# Allegro board W3IOA board.brd
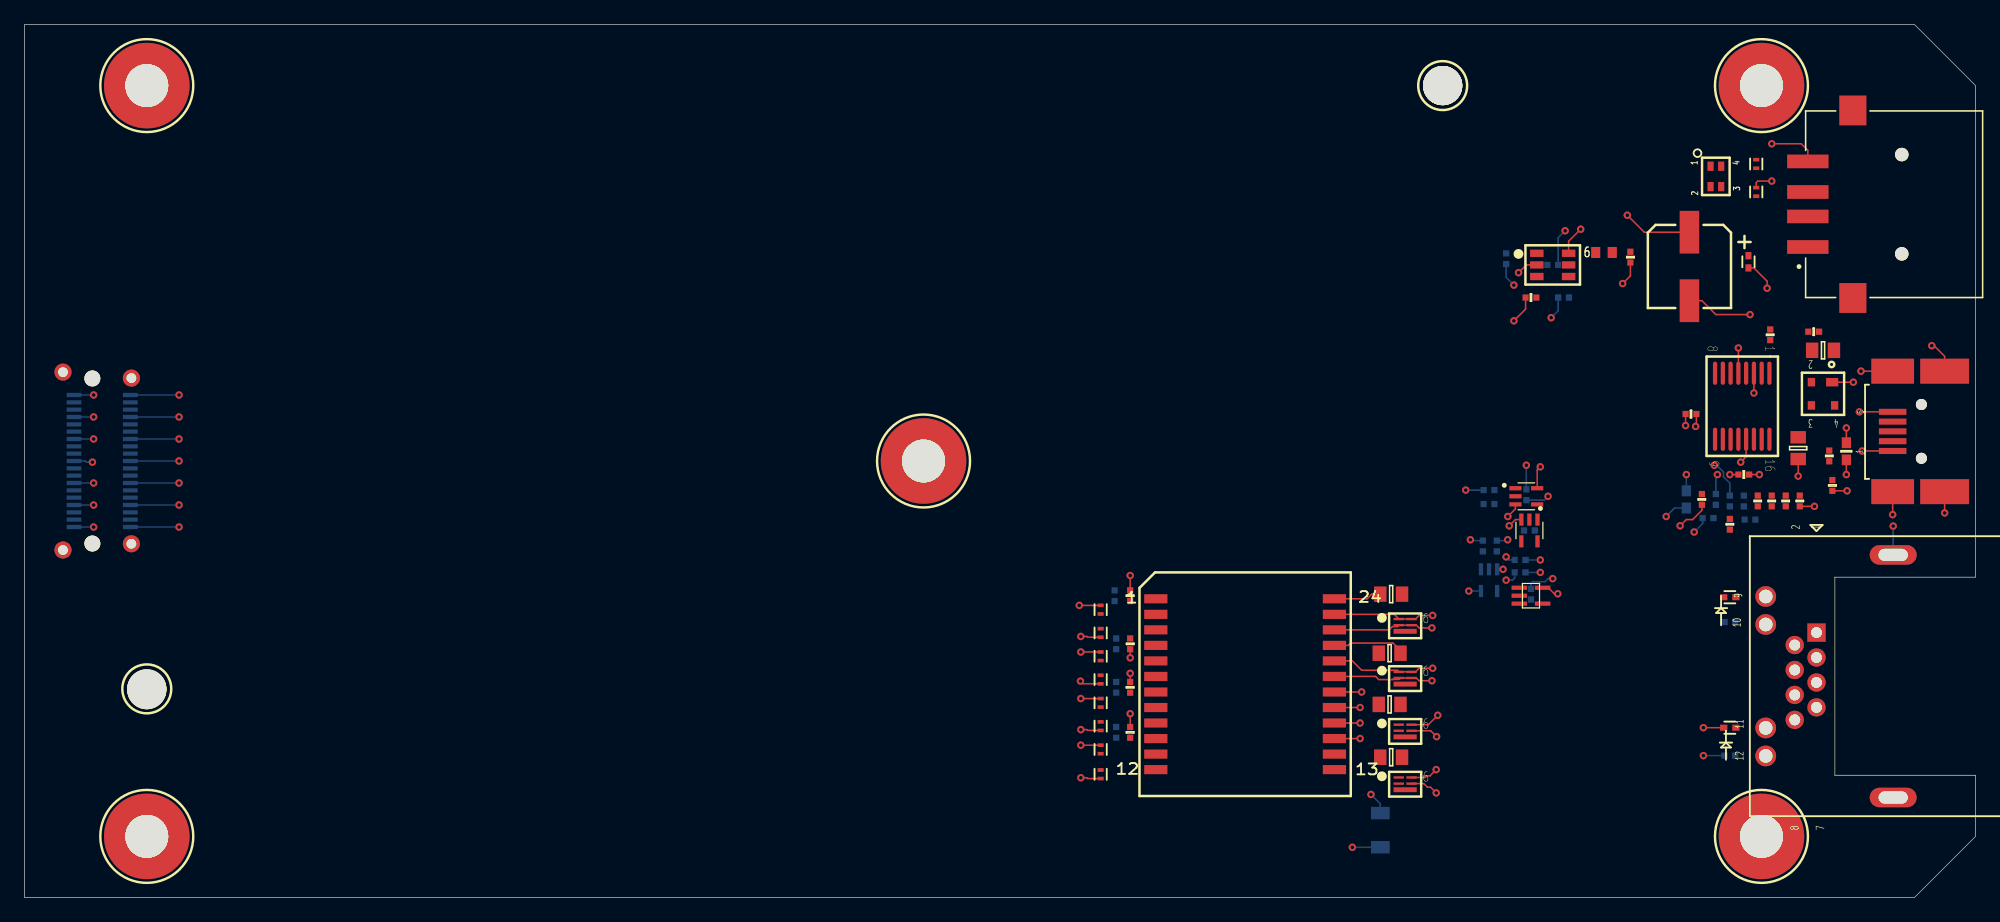
[diagram p0: board, top side]
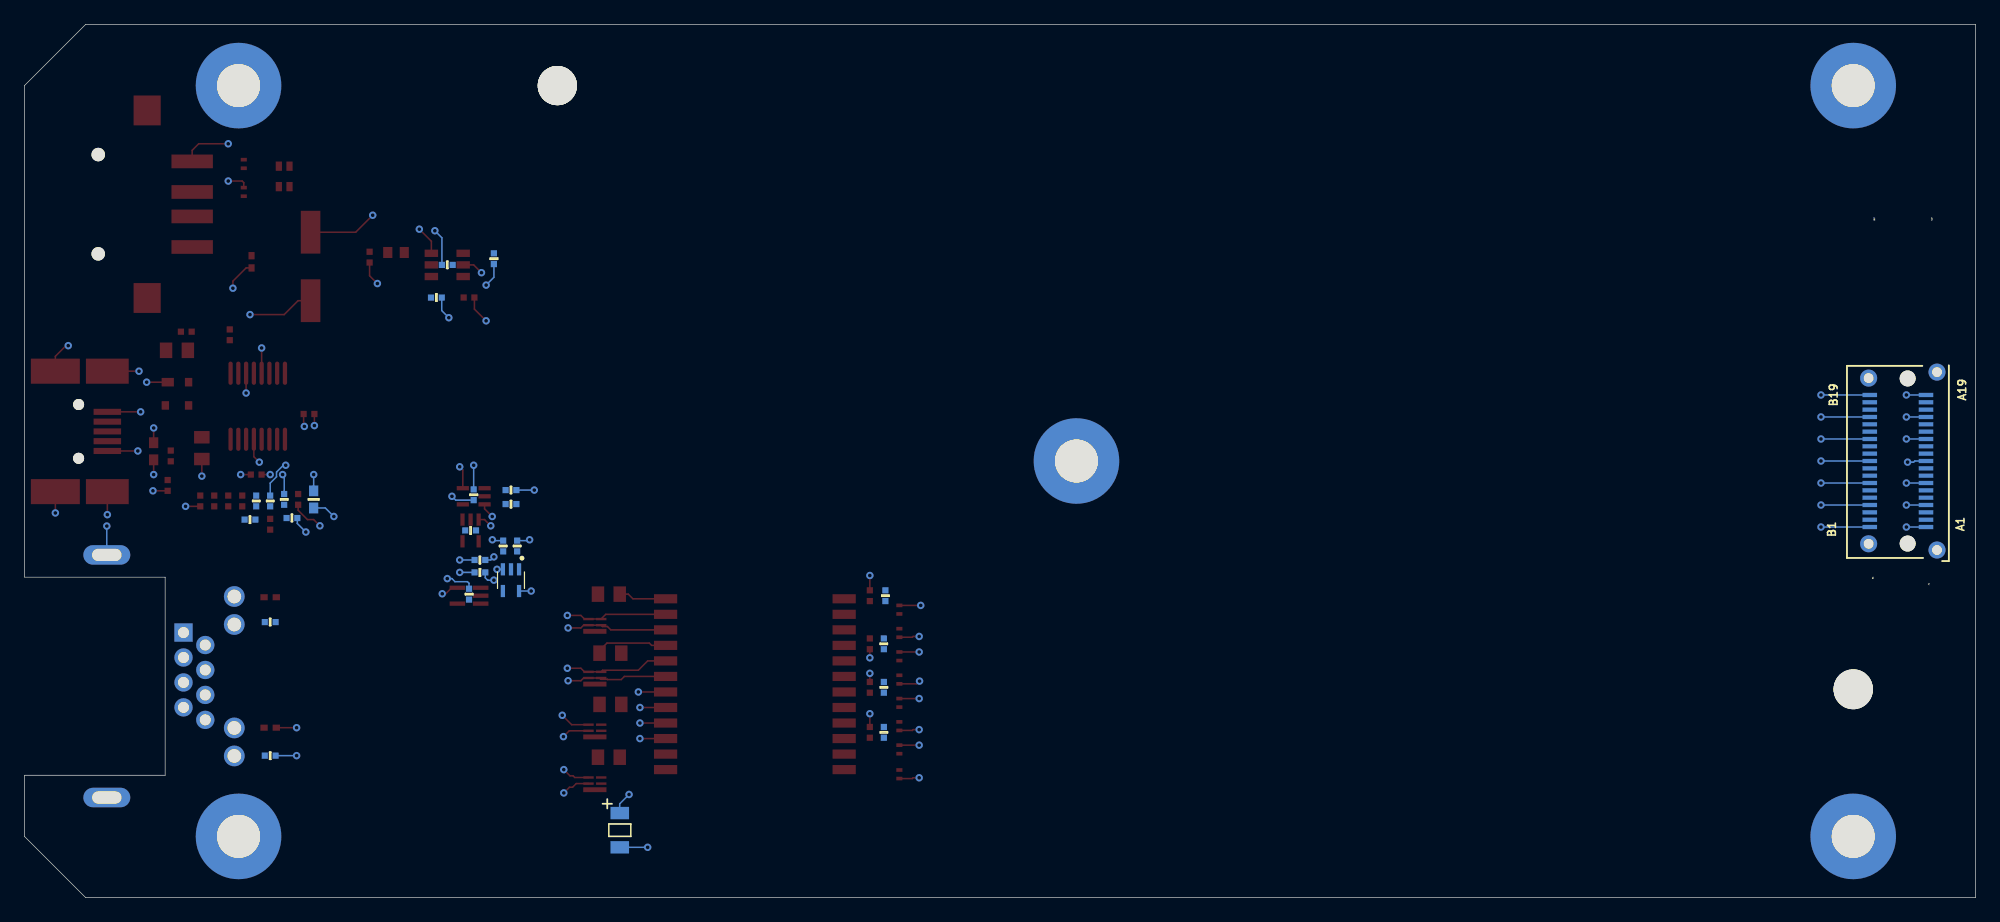
[diagram p1: board, bottom side, seen from below]

Outline 159.5 x 71.4 mm; copper layers: TOP, L2_GND1, L3_SIG1, L4_PWR1, L5_GND2, L6_SIG2, L7_PWR/GND, BOTTOM. Coordinates in mm from the lower left corner of the outline.
Outline path: 0,71.4 0,0 154.5,0 159.5,5 159.5,10 148,10 148,26.2 159.5,26.2 159.5,66.4 154.5,71.4 0,71.4

## Design rules (mm)
constraint set DEFAULT: min track width 0.127
net group AC_GBE0_MDIO0: nets AC_GBE0_MDIO0_N AC_GBE0_MDIO0_P
net group AC_GBE0_MDIO1: nets AC_GBE0_MDIO1_N AC_GBE0_MDIO1_P
net group AC_GBE0_MDIO2: nets AC_GBE0_MDIO2_N AC_GBE0_MDIO2_P
net group AC_GBE0_MDIO3: nets AC_GBE0_MDIO3_N AC_GBE0_MDIO3_P
net group DP1: nets USB_UART_RX_R USB_UART_TX_R
net group DP2: nets AC_USB_UART_RX AC_USB_UART_TX
net group DP3: nets PHY_TXRXN_A PHY_TXRXP_A
net group DP4: nets PHY_TXRXN_B PHY_TXRXP_B
net group DP5: nets PHY_TXRXN_C PHY_TXRXP_C
net group DP6: nets PHY_TXRXN_D PHY_TXRXP_D
net group SW_USB1_CONN_D: nets SW_USB1_CONN_DN SW_USB1_CONN_DP

## Placement (name value [footprint] x y rotation side)
C1  0.1uF  [SMC0402A]  122.27 26.59 0 bottom
C2  0.1uF  [SMC0402A]  123.16 24.81 270 bottom
C3  NA  [SMC0402A]  147.79 33.7 270 top
C4  2.2uF  [SMC0603A]  148.94 36.5 270 top
C5  47pF  [SMC0805A]  147.03 44.75 0 top
C6  47pF  [SMC0805A]  145 36.75 270 top
C7  0.1uF  [SMC0402A]  137.63 31.04 180 bottom
C8  0.1uF  [SMC0402A]  136.24 39.54 180 top
C9  2.2uF  [SMC0603A]  135.86 32.56 90 bottom
C10  0.1uF  [SMC0402A]  140.56 34.59 0 top
C11  0.1uF  [SMC0402A]  121.12 52.24 270 bottom
C12  150uF  [SMC2626_ALEL_C]  136.11 51.61 0 top
C13  0.1uF  [SMC0402A]  131.28 52.37 270 top
C14  0.1uF  [SMC0402A]  122.27 27.61 0 bottom
C15  1000pF  [SMC1206A]  110.84 5.51 270 bottom
C16  0.1uF  [SMC0402A]  90.39 20.75 270 top
C18  0.1uF  [SMC0402A]  90.39 17.19 90 top
C19  0.1uF  [SMC0402A]  90.39 13.51 90 top
C218  0.1uF  [SMC0402A]  90.39 24.68 90 top
C5904  0.1uF  [SMC0402A]  122.78 32.94 270 bottom
D1  COMP_VALUE  [X1SON_0110X0070_070]  141.57 59.99 90 top
D2  COMP_VALUE  [X1SON_0110X0070_070]  141.57 57.7 270 top
D3  COMP_VALUE  [X1SON_0101X0070_0100]  140.94 51.99 270 top
D4  COMP_VALUE  [X1SON_0101X0070_0100]  139.41 24.56 180 top
D5  COMP_VALUE  [X1SON_0101X0070_0100]  139.41 13.89 180 top
D6  COMP_VALUE  [X1SON_0110X0070_070]  87.98 21.64 90 top
D7  COMP_VALUE  [X1SON_0110X0070_070]  87.98 23.54 270 top
D8  COMP_VALUE  [X1SON_0110X0070_070]  87.98 17.83 90 top
D9  COMP_VALUE  [X1SON_0110X0070_070]  87.98 19.73 270 top
D10  COMP_VALUE  [X1SON_0110X0070_070]  87.98 14.02 90 top
D11  COMP_VALUE  [X1SON_0110X0070_070]  87.98 15.92 270 top
D12  COMP_VALUE  [X1SON_0110X0070_070]  87.98 10.08 90 top
D13  COMP_VALUE  [X1SON_0110X0070_070]  87.98 12.11 270 top
FB1  60  [INDC1608_IS0603Q]  129.13 52.75 0 top
J1  COMP_VALUE  [CONN4_USB_1-292303-6]  153.47 52.64 90 top
J4  COMP_VALUE  [CONN_RJE721881411]  146.5 21.67 90 top
J75  COMP_VALUE  [CNT5F_SMT_USB_V3]  152.72 36.52 90 top
J78  COMP_VALUE  [SCONN38_G42V11342HR]  5.55 28.95 90 bottom
L1  820OHM  [CHOKE_0805USB]  138.27 58.98 90 top
M1  COMP_VALUE  [MH_0000X0000_320NPT]  10 17.06 0 top
M2  COMP_VALUE  [MH_0000X0000_320NPT]  115.94 66.4 0 top
MH1  COMP_VALUE  [MH_0700X0700_350PT]  10 66.4 0 top
MH2  COMP_VALUE  [MH_0700X0700_350PT]  10 5 0 top
MH3  COMP_VALUE  [MH_0700X0700_350PT]  73.5 35.7 0 top
MH4  COMP_VALUE  [MH_0700X0700_350PT]  142 66.4 0 top
MH5  COMP_VALUE  [MH_0700X0700_350PT]  142 5 0 top
NOREF  -  []  2.46 40.84 90 top
NOREF#2  -  []  8.65 30.3 90 top
NOREF#3  -  [unnamed#2]  115.94 66.4 0 top
NOREF#4  -  []  8.74 28.93 90 top
NOREF#5  -  []  7.23 28.2 0 top
NOREF#6  -  []  4.05 30.3 90 top
NOREF#7  -  [unnamed#3]  10 66.4 0 top
NOREF#8  -  [unnamed#3]  73.5 35.7 0 top
NOREF#9  -  [unnamed#3]  142 5 0 top
NOREF#10  -  []  149.47 49.03 90 top
NOREF#11  -  [unnamed#3]  10 5 0 top
NOREF#12  -  [unnamed#2]  10 17 0 top
NOREF#13  -  [unnamed#3]  142 66.4 0 top
NOREF#14  -  []  3.15 28.42 90 top
NOREF#15  -  []  145.79 53.2 90 top
R1  0  [SMR0402A]  89.25 20.75 90 bottom
R2  0  [SMR0402A]  89.25 17.19 270 bottom
R3  0  [SMR0402A]  89.25 13.51 270 bottom
R136  0  [SMR0402A]  139.41 32.43 270 bottom
R137  0  [SMR0402A]  138.27 32.56 270 bottom
R138  0  [SMR0402A]  137.13 32.56 90 top
R139  0  [SMR0402A]  142.72 46.02 90 top
R140  0  [SMR0402A]  141.7 32.43 90 top
R141  10K  [SMR0402A]  119.73 33.32 180 bottom
R142  10K  [SMR0402A]  120.36 28.75 90 bottom
R143  10K  [SMR0402A]  123.03 30.02 0 bottom
R144  10K  [SMR0402A]  119.73 32.18 0 bottom
R145  10K  [SMR0402A]  139.41 30.53 270 top
R146  27  [SMR0402A]  142.84 32.43 90 top
R147  27  [SMR0402A]  146.27 46.27 180 top
R148  4.7K  [SMR0402A]  141.06 30.91 0 bottom
R149  4.7K  [SMR0402A]  143.99 32.43 90 top
R150  10K  [SMR0402A]  145.13 32.43 270 top
R151  10K  [SMR0402A]  123.16 49.07 180 top
R152  10K  [SMR0402A]  125.82 49.07 180 bottom
R153  90.9K  [SMR0402A]  124.94 51.74 180 bottom
R154  0  [SMR0402A]  89.12 24.68 270 bottom
R158  240  [SMR0402A]  139.41 11.6 0 bottom
R159  240  [SMR0402A]  139.41 22.53 180 bottom
R462  75  [SMR0805A]  111.73 11.48 0 top
R463  75  [SMR0805A]  111.6 15.79 0 top
R464  75  [SMR0805A]  111.6 19.99 0 top
R465  75  [SMR0805A]  111.73 24.81 180 top
R621  0  [SMR0402A]  147.54 36.11 270 top
R710  0  [SMR0402A]  140.56 32.43 270 bottom
R5906  10K  [SMR0402A]  119.22 28.75 90 bottom
T1  COMP_VALUE  [TRANSFORM_0024_1753X1220_127]  99.79 17.45 0 top
U1  -  [SC70-5_SC88-5_1_2_3_4_5]  123.03 30.02 270 top
U2  -  [SOT23_5_P0_65]  123.16 24.68 180 top
U3  COMP_VALUE  [SOT143B]  147.03 41.2 180 top
U4  COMP_VALUE  [SSOP_0016_0500X0400_063]  140.43 40.18 270 top
U5  COMP_VALUE  [SOT23_0006_0300X0175_095]  124.94 51.74 0 top
U6  -  [SC70-5_SC88-5_1_2_3_4_5]  119.73 25.95 270 bottom
U110  COMP_VALUE  [ESD_SLP1610P4T]  112.87 9.32 0 top
U111  COMP_VALUE  [ESD_SLP1610P4T]  112.87 13.64 0 top
U112  COMP_VALUE  [ESD_SLP1610P4T]  112.87 17.95 0 top
U113  COMP_VALUE  [ESD_SLP1610P4T]  112.87 22.27 0 top
U5903  -  [SC70-5_SC88-5_1_2_3_4_5]  122.78 32.81 0 top

## Library data of the parts
C1 C2 C7 C8 C11 C13 C14 C5904 = CAP: alternate symbols: (0402,0402_ALT,SMX0402B); part number: CAP_0402LF-0.1UF,25V,10%,X7R,; tolerance: 10%
C3 = CAP: alternate symbols: (0402,0402_ALT,SMX0402B); part number: CAP_0402LF-0.01UF,16V,10%,X7R,C50295-001; tolerance: 10%
C4 C9 = CAP: alternate symbols: (); part number: CAP_0603-2.2UF,10V,10%,X7R,603269-068; tolerance: 10%
C5 C6 = CAP: alternate symbols: (SMC0805AW); part number: CAP_0805-47PF,50V,5%,COG,108425-009; tolerance: 5%
C10 C16 C18 C19 C218 = CAP: alternate symbols: (0402,0402_ALT,SMX0402B,SMC0402A_SPL); part number: CAP_0402LF-0.1UF,16V,10%,X7R,A36096-030; tolerance: 10%
C12 = CAPP: Tolerance: 20%; User Part Number: EEE-FP1A151AL; part number: CAPP_2626 -150UF,10V,20%,,EEE-FP1A151AL; tolerance: 20%
C15 = CAP: alternate symbols: (SMC1206AW); part number: CAP_1206LF-1000PF,2KV,20%,X7R,22006117; tolerance: 20%
D1 D2 D6-D13 = ESD321DPYR: User Part Number: PART_NO; Tolerance: TOLERANCE
D3-D5 = ESD_COMMON_ANODE: User Part Number: TPD1E10B06DPYR; Tolerance: TOLERANCE; part number: ESD_COMMON_ANODE_2-X1SON-TPD1E10B06DPYR,5.5 V
FB1 = FERRITE: User Part Number: MPZ1608S600ATAH0; part number: FERRITE_SM-60,FB,MPZ1608S600ATAH0
J1 = USB2: Tolerance: TOLERANCE; User Part Number: PART_NO
J4 = CONNRJ45_2LEDS: Tolerance: TOLERANCE; User Part Number: RJE72-188-1411; part number: CONNRJ45_2LEDS-RJE72-188-1411
J75 = CONN5_USB_4GND_V2: User Part Number: 22012093; Tolerance: TOLERANCE; part number: CONN5_USB_4GND_V2-22012093
J78 = G42V11342HR: User Part Number: PART_NO; Tolerance: TOLERANCE
L1 = CHOKE_4PIN: User Part Number: 0805USB-262MLC; Tolerance: TOLERANCE; part number: CHOKE_4PIN_0805-820OHM,FERRITE,0805USB-262MLC
M1 M2 = MH_0000X0000_320NPT: User Part Number: PART_NO; Tolerance: TOLERANCE
MH1-MH5 = MH_0700X0700_350PT: User Part Number: PART_NO; Tolerance: TOLERANCE
R1-R3 R154 = RES: alternate symbols: (0402,0402_ALT,SMX0402B); part number: RES_0402-0,5%,1/16W,CHIP,A36093-001; tolerance: 5%
R136-R138 = RES: alternate symbols: (0402,0402_ALT,SMX0402B); part number: RES_0402LF-0,5%,1/16W,CHIP,A93549-001; tolerance: 5%
R139 R140 R621 R710 = RES: alternate symbols: (0402,0402_ALT,SMX0402B); part number: RES_0402LF-0,5%,1/16W,CHIP,A93549-001; tolerance: 5%; room: P3V3_AUX_BMC_RGM_SWITCH
R141-R145 R150-R152 R5906 = RES: alternate symbols: (0402,0402_ALT,SMX0402B); part number: RES_0402-10K,1%,1/16W,CHIP,A36092-434; tolerance: 1%
R146 R147 = RES: alternate symbols: (0402,0402_ALT,SMX0402B); part number: RES_0402LF-27,5%,1/16W,CHIP,22013425; tolerance: 5%
R148 R149 = RES: alternate symbols: (0402,0402_ALT,SMX0402B); part number: RES_0402LF-4.7K,5%,1/16W,CHIP,A93549-020; tolerance: 5%
R153 = RES: alternate symbols: (0402,0402_ALT,SMX0402B); part number: RES_0402LF-90.9K,1%,1/16W,CHIP,A93548-381; tolerance: 1%
R158 R159 = RES: alternate symbols: (SMX0402,SMX0402A,SMX0402B,SMR0402A_SPL); part number: RES_0402-240,1.0%,1/16W,CHIP,G21796-294; tolerance: 1.0%
R462-R465 = RES: alternate symbols: (SMR0805AW); part number: RES_0805-75,5%,1/10W,CHIP,201645-022; tolerance: 5%
T1 = H5007: User Part Number: PART_NO; Tolerance: TOLERANCE
U1 U6 U5903 = 74AHC1G08GW: User Part Number: Part No
U2 = 1G125: part number: 1G125-91617021-001
U3 = PRTR5V0U: User Part Number: PRTR5V0U2X,215; Tolerance: TOLERANCE; part number: PRTR5V0U_SOT-143B-PRTR5V0U2X,215
U4 = FT230XS: Tolerance: TOLERANCE; User Part Number: FT230XS-R; part number: FT230XS_SSOP-IC,FT230XS-R
U5 = TPS25221DBVR: User Part Number: PART_NO; Tolerance: TOLERANCE
U110-U113 = RCLAMP0542T: Tolerance: TOLERANCE; User Part Number: PART_NO

## Footprints (pads in the part's own frame, mm; a bottom-side part is the same pattern mirrored in y, then rotated)
CHOKE_0805USB
  rect 0.76x0.51 smd: 1(0.835,0.435) 2(-0.835,0.435) 3(-0.835,-0.435) 4(0.835,-0.435)
CNT5F_SMT_USB_V3
  round 0.9 hole 0.9 unplated: (-0.6,-2.35) (3.8,-2.35)
  rect 0.5x2.25 smd: 1(0,0) 2(0.8,0) 3(1.6,0) 4(2.4,0) 5(3.2,0)
  rect 2.05x3.5 smd: 6(-3.325,0) 7(6.525,0)
  rect 2.05x4 smd: 8(-3.325,-4.25) 9(6.525,-4.25)
CONN4_USB_1-292303-6
  round 1.1 hole 1.1 unplated: (0,0) (8.12,0)
  rect 1.12x3.39 smd: 1(0.56,7.68) 2(3.06,7.68) 3(5.06,7.68) 4(7.56,7.68)
  rect 2.44x2.22 smd: SH1(-3.61,4) SH2(11.73,4)
CONN_RJE721881411
  rect 1.5x1.5 hole 0.9: 1(0,0)
  round 1.5 hole 0.9: 2(-1.02,1.78) 3(-2.04,0) 4(-3.06,1.78) 5(-4.08,0) 6(-5.1,1.78) 7(-6.12,0) 8(-7.14,1.78)
  round 1.7 hole 1.12: 9(2.95,4.15) 10(0.66,4.15) 11(-7.8,4.15) 12(-10.09,4.15)
  oval 1.6x3.84 hole 1x2.4: GND_SH1(-13.49,-6.27) GND_SH2(6.35,-6.27)
ESD_SLP1610P4T
  rect 0.85x0.2 smd: 1(-0.52,0.5) 2(-0.52,0) 5(0.52,0) 6(0.52,0.5)
  rect 1.9x0.4 smd: 3(0,-0.5)
INDC1608_IS0603Q
  rect 0.75x0.9 smd: 1(-0.675,0) 2(0.675,0)
MH_0000X0000_320NPT
  round 3.2 hole 3.2 unplated: (0,0)
MH_0700X0700_350PT
  round 7 hole 3.5: 1(0,0)
SC70-5_SC88-5_1_2_3_4_5
  rect 1x0.35 smd: 1(-0.889,0.66) 2(-0.889,0) 3(-0.889,-0.66) 4(0.889,-0.66) 5(0.889,0.66)
SCONN38_G42V11342HR
  round 1.3 hole 1.3 unplated: (0,0) (13.5,0)
  rect 0.35x1.2 smd: A1(1.35,-1.5) A2(1.95,-1.5) A3(2.55,-1.5) A4(3.15,-1.5) A5(3.75,-1.5) A6(4.35,-1.5) A7(4.95,-1.5) A8(5.55,-1.5) A9(6.15,-1.5) A10(6.75,-1.5) A11(7.35,-1.5) A12(7.95,-1.5) A13(8.55,-1.5) A14(9.15,-1.5) A15(9.75,-1.5) A16(10.35,-1.5) A17(10.95,-1.5) A18(11.55,-1.5) A19(12.15,-1.5) B1(1.35,3.1) B2(1.95,3.1) B3(2.55,3.1) B4(3.15,3.1) B5(3.75,3.1) B6(4.35,3.1) B7(4.95,3.1) B8(5.55,3.1) B9(6.15,3.1) B10(6.75,3.1) B11(7.35,3.1) B12(7.95,3.1) B13(8.55,3.1) B14(9.15,3.1) B15(9.75,3.1) B16(10.35,3.1) B17(10.95,3.1) B18(11.55,3.1) B19(12.15,3.1)
  round 1.4 hole 0.8: M1(-0.53,-2.4) M2(14.02,-2.4) M3(-0.02,3.19) M4(13.53,3.19)
SMC0402A
  rect 0.51x0.51 smd: 1(-0.44,0) 2(0.44,0)
SMC0603A
  rect 0.89x0.76 smd: 1(-0.7,0) 2(0.7,0)
SMC0805A
  rect 1.02x1.27 smd: 1(-0.89,0) 2(0.89,0)
SMC1206A
  rect 1.016x1.524 smd: 1(-1.4,0) 2(1.4,0)
SMC2626_ALEL_C
  rect 1.6x3.5 smd: 1(0,2.8) 2(0,-2.8)
SMR0402A
  rect 0.51x0.51 smd: 1(-0.44,0) 2(0.44,0)
SMR0805A
  rect 1.02x1.27 smd: 1(-0.889,0) 2(0.889,0)
SOT23_5_P0_65
  rect 1.27x0.35 smd: 1(0.953,-0.65) 2(0.953,0) 3(0.953,0.65) 4(-0.953,0.65) 5(-0.953,-0.65)
SOT23_0006_0300X0175_095
  rect 1.1x0.6 smd: 1(-1.3,0.95) 2(-1.3,0) 3(-1.3,-0.95) 4(1.3,-0.95) 5(1.3,0) 6(1.3,0.95)
SOT143B
  rect 1x0.7 smd: 1(-0.75,-0.95)
  rect 0.6x0.7 smd: 2(0.95,-0.95) 3(0.95,0.95) 4(-0.95,0.95)
SSOP_0016_0500X0400_063
  oval 1.9x0.35 smd: 1(-2.7,2.223) 2(-2.7,1.587) 3(-2.7,0.953) 4(-2.7,0.318) 5(-2.7,-0.318) 6(-2.7,-0.953) 7(-2.7,-1.587) 8(-2.7,-2.223) 9(2.7,-2.223) 10(2.7,-1.587) 11(2.7,-0.953) 12(2.7,-0.318) 13(2.7,0.318) 14(2.7,0.953) 15(2.7,1.587) 16(2.7,2.223)
TRANSFORM_0024_1753X1220_127
  rect 1.9x0.75 smd: 1(-7.3,6.985) 2(-7.3,5.715) 3(-7.3,4.445) 4(-7.3,3.175) 5(-7.3,1.905) 6(-7.3,0.635) 7(-7.3,-0.635) 8(-7.3,-1.905) 9(-7.3,-3.175) 10(-7.3,-4.445) 11(-7.3,-5.715) 12(-7.3,-6.985) 13(7.3,-6.985) 14(7.3,-5.715) 15(7.3,-4.445) 16(7.3,-3.175) 17(7.3,-1.905) 18(7.3,-0.635) 19(7.3,0.635) 20(7.3,1.905) 21(7.3,3.175) 22(7.3,4.445) 23(7.3,5.715) 24(7.3,6.985)
unnamed#2
  round 3.2 hole 3.2 unplated: (0,0)
unnamed#3
  round 3.5 hole 3.5 unplated: (0,0)
X1SON_0101X0070_0100
  rect 0.6x0.5 smd: 1(-0.5,0) 2(0.5,0)
X1SON_0110X0070_070
  rect 0.3x0.5 smd: 1(-0.35,0) 2(0.35,0)

## Nets
GND: C1.2(B) C2.2(B) C3.2(B) C4.2(B) C5.2(B) C6.2(B) C7.2(B) C8.2(B) C9.2(B) C10.2(B) C11.2(B) C12.2(B) C13.2(B) C14.2(B) C15.2(B) C16.2(B) C18.2(B) C19.2(B) C218.2(B) C5904.2(B) D1.1 D2.1 D3.2(K2) D4.2(K2) D5.2(K2) D6.1 D7.1 D8.1 D9.1 D10.1 D11.1 D12.1 D13.1 J1.4 J1.SH1 J4.GND_SH1 J4.GND_SH2 J75.5 J75.6 J75.7 J75.8 J75.9 J78.A1 J78.A4 J78.A7 J78.A10 J78.A13 J78.A16 J78.A19 J78.B1 J78.B4 J78.B7 J78.B10 J78.B13 J78.B16 J78.B19 J78.M1 J78.M2 J78.M3 J78.M4 MH1.1(MH1) MH2.1(MH1) MH3.1(MH1) MH4.1(MH1) MH5.1(MH1) R150.2(B) R153.1 U1.3 U2.3 U3.1 U4.5 U4.13 U5.2 U6.3 U5903.3
P3V3_OUT: C8.1 C9.1 R137.2(B) R138.1 U4.10
P3V3_VCCIO: C7.1 R136.2(B) R138.2(B) R145.1 R148.1 U4.3(VCCIO)
P5V_STBY: C11.1 J78.A2 J78.A3 U5.1
P5V_USB: C3.1 C4.1 J75.1(VBUS) R149.1 R621.1 U3.4(VCC)
P5V_USB1: FB1.1 U5.6(OUT)
P5V_USB1_CONN: C12.1 C13.1 D3.1 FB1.2(B) J1.1(VUSB)
VDD3_3V_FP: C1.1 C2.1 C14.1 C5904.1 J78.B2 J78.B3 R136.1 R137.1 R141.2(B) R142.2(B) R143.2(B) R144.2(B) R151.2(B) R152.2(B) R158.1 R159.2(B) R710.1 R5906.2(B) U1.5 U2.5(VCC) U6.5 U5903.5
AC_GBE0_ACT_N: J78.A14 R141.1 U6.2
AC_GBE0_CTREF: J78.A12 R1.1 R2.1 R3.1 R154.1
AC_GBE0_LINK100_N: J78.A15 R143.1 U5903.2
AC_GBE0_LINK1000_N: J78.A18 R5906.1 U1.2
AC_GBE0_LINK_N: J78.A17 R142.1 U5903.1
AC_GBE0_MDIO0_N: D6.2(IO) J78.B9 T1.3
AC_GBE0_MDIO0_P: D7.2(IO) J78.B8 T1.2
AC_GBE0_MDIO1_N: D8.2(IO) J78.B12 T1.6
AC_GBE0_MDIO1_P: D9.2(IO) J78.B11 T1.5
AC_GBE0_MDIO2_N: D10.2(IO) J78.B15 T1.9
AC_GBE0_MDIO2_P: D11.2(IO) J78.B14 T1.8
AC_GBE0_MDIO3_N: D12.2(IO) J78.B18 T1.12
AC_GBE0_MDIO3_P: D13.2(IO) J78.B17 T1.11
AC_USB_UART_RX: J78.A9 R139.2(B)
AC_USB_UART_TX: J78.A11 R140.2(B)
COME_GBE0_ACT_N: D4.1 J4.9 U2.4
COME_GBE0_LINK_N: D5.1 J4.11(K_LD2) U1.4 U2.1
CT0: C218.1 R154.2(B) T1.1
CT1: C16.1 R1.2(B) T1.4
CT2: C18.1 R2.2(B) T1.7
CT3: C19.1 R3.2(B) T1.10
FPGA_USB2_UART_RESET_N: J78.B5 R145.2(B) U4.11
FT_CBUS0: R149.2(B) R150.1 U4.15
PHY_TXRXN_A: J4.2 T1.22 U113.2 U113.5(OUT2)
PHY_TXRXN_B: J4.6 T1.19 U112.2 U112.5(OUT2)
PHY_TXRXN_C: J4.5 T1.16 U111.2 U111.5(OUT2)
PHY_TXRXN_D: J4.8 T1.13 U110.2 U110.5(OUT2)
PHY_TXRXP_A: J4.1 T1.23 U113.1 U113.6
PHY_TXRXP_B: J4.3 T1.20 U112.1 U112.6
PHY_TXRXP_C: J4.4 T1.17 U111.1 U111.6
PHY_TXRXP_D: J4.7 T1.14 U110.1 U110.6
SW_USB1_CONN_DN: D1.2(IO) J1.2 L1.4(B2)
SW_USB1_CONN_DP: D2.2(IO) J1.3 L1.3
SW_USB1_DN: J78.A6 L1.1
SW_USB1_DP: J78.A5 L1.2
UNNAMED_5_CONNRJ452LEDS_I1_ALD1: J4.10 R159.1
UNNAMED_5_CONNRJ452LEDS_I1_ALD2: J4.12 R158.2(B)
UNNAMED_6_1G125_I29_A: U2.2 U6.4
UNNAMED_6_74AHC1G08GW_I21_1: U1.1 U5903.4
UNNAMED_6_74AHC1G08GW_I37_1: R144.1 U6.1
UNNAMED_207_RES_I32_B: R153.2(B) U5.5
UNNAMED_235_CAP_I87_A: C15.1 R462.1 R463.1 R464.1 R465.1
UNNAMED_235_H5007_I99_15: R462.2(B) T1.15
UNNAMED_235_H5007_I99_18: R463.2(B) T1.18
UNNAMED_235_H5007_I99_21: R464.2(B) T1.21
UNNAMED_235_H5007_I99_24: R465.2(B) T1.24
USB01_FAULT_N: J78.A8 R152.1 U5.4
USB2_CONN_DN: C6.1 J75.2 R146.1 U3.3
USB2_CONN_DN_R: R146.2(B) U4.9
USB2_CONN_DP: C5.1 J75.3 R147.1 U3.2
USB2_CONN_DP_R: R147.2(B) U4.8
USB02_VBUS_EN: J78.B6 R151.1 U5.3
USB_UART_RX_R: R139.1 U4.1
USB_UART_TX_R: R140.1 R148.2(B) U4.4
USB_UART_VCC: C10.1 R621.2(B) R710.2(B) U4.12

Pads without a net: J1 SH2; J75 4; U4 2 6 7 14 16; U110 3; U111 3; U112 3; U113 3

## Via types
v1: diameter 0.61, hole 0.305, TOP to BOTTOM, 96 vias

## Routing (per net, layer and track width the routed paths; a pad name or vN(x,y) marks a point on that pad's centre or on a via; arc(x,y) is an arc through that point)
GND: length 119.4
  TOP w0.127: J75.8 v1(156.98,31.45) ; C16.2 v1(90.39,19.61) ; D5.2 v1(137.25,13.89) ; 90.39,17.57 C18.2 v1(90.39,18.34) ; U1.3 121.89,30.91 v1(121.38,30.4) ; J75.7 v1(150.14,43.05) ; v1(130.65,50.21) 131.28,50.85 C13.2 ; v1(155.92,45.13) 156.1,45.13 156.98,44.26 J75.9 ; D8.1 86.55,17.48 v1(86.33,17.7) ; U4.5 v1(140.11,44.94) ; C4.2 v1(148.94,34.59) ; C3.2 v1(149,33.26) ; v1(140.3,35.61) 140.75,36.05 U4.13 ; C8.2 v1(135.8,38.6) ; C218.2 v1(90.39,26.34) ; D3.2 141.38,51.49 142.46,50.41 v1(142.46,49.83) ; D7.1 v1(86.23,23.89) ; D10.1 86.92,13.67 86.85,13.73 v1(86.36,13.73) ; C10.2 v1(141.83,34.59) ; 90.39,13.76 C19.2 v1(90.39,15.03) ; D12.1 86.92,9.73 86.85,9.79 v1(86.36,9.79) ; C12.2 137.13,48.81 138.27,47.67 v1(141.06,47.67) ; C6.2 v1(145,34.46) ; D9.1 v1(86.36,20.08) ; U5903.3 121.89,31.79 v1(121.26,31.16) ; v1(142.84,58.59) 141.7,58.59 141.57,58.47 D2.1 ; v1(122.14,51.1) 122.78,51.74 U5.2 ; v1(86.36,21.35) 86.85,21.35 86.92,21.29 D6.1 ; D13.1 v1(86.36,12.46) ; R150.2 v1(146.33,31.99) ; v1(142.84,61.64) 145.25,61.64 145.79,61.11 J1.4 ; J75.6 v1(152.72,31.31) ; J75.5 v1(150,39.72) ; D11.1 v1(86.36,16.27) ; U3.1 v1(149.51,42.15)
  BOTTOM w0.127: v1(121.76,50.09) 121.12,50.72 C11.2 ; J78.B7 v1(12.63,33.9) ; J78.A16 v1(5.66,39.3) ; J78.A19 v1(5.66,41.1) ; C5904.2 124.24,32.5 v1(124.55,32.81) ; v1(136.5,29.89) 137.2,30.59 C7.2 ; J4.GND_SH2 v1(152.77,30.38) ; C14.2 v1(123.92,27.61) ; R153.1 125.37,53.95 v1(125.95,54.53) ; J78.B4 v1(12.63,32.1) ; J78.B13 v1(12.63,37.5) ; C9.2 v1(135.86,34.59) ; J78.B16 v1(12.63,39.3) ; J78.A4 v1(5.66,32.1) ; J78.A10 4.97,35.7 5.06,35.61 v1(5.55,35.61) ; J78.B19 v1(12.63,41.1) ; C1.2 v1(123.92,26.59) ; J78.B10 v1(12.63,35.7) ; U6.3 v1(120.87,26.84) ; J78.A1 v1(5.66,30.3) ; J78.A7 v1(5.66,33.9) ; J78.B1 v1(12.63,30.3) ; C15.2 v1(108.56,4.11) ; J78.A13 v1(5.66,37.5)
P3V3_OUT: length 5.7
  TOP w0.127: C8.1 136.68,38.59 v1(136.62,38.53) ; v1(135.35,30.4) 135.86,30.91 136.37,30.91 137.13,31.67 R138.1
  BOTTOM w0.127: v1(134.21,31.16) 134.9,31.86 C9.1
P3V3_VCCIO: length 1.6
  TOP w0.127: U4.3 v1(141.38,41.26)
P5V_USB: length 3.7
  TOP w0.127: C4.1 v1(148.94,38.4) ; J75.1 v1(150.23,36.52)
P5V_USB1: length 2.4
  TOP w0.127: U5.6 126.23,53.67 v1(127.22,54.66)
P5V_USB1_CONN: length 5.7
  TOP w0.127: C12.1 132.42,54.41 v1(131.03,55.8)
VDD3_3V_FP: length 24.8
  TOP w0.127: v1(121.76,47.16) 122.72,48.12 R151.2 ; U2.5 124.57,25.34 125.06,24.84 v1(125.35,24.84) ; U5903.5 123.67,34.97 v1(123.92,35.23)
  BOTTOM w0.127: R141.2 v1(117.82,33.32) ; R142.2 121.18,29.19 v1(121.25,29.26) ; R158.1 v1(137.25,11.6) ; v1(138.4,34.59) 138.27,34.46 R137.1 ; R152.2 125.38,47.99 v1(124.81,47.42) ; v1(138.14,35.35) 138.34,35.35 138.89,34.8 138.89,34.41 139.41,33.89 R136.1 ; v1(124.94,26.08) 124.55,26.08 124.3,25.83 123.28,25.83 123.16,25.7 C2.1 ; C14.1 121.38,27.61 v1(121.12,27.86) ; U6.5 v1(118.08,25.07) ; C1.1 121.83,26.14 121.64,25.95 v1(121.12,25.95) ; R5906.2 118.27,29.19 v1(118.2,29.26) ; C5904.1 v1(122.78,35.35)
PHY_TXRXN_A: length 8.2
  TOP w0.127: v1(115.06,22.05) 114.01,22.05 113.79,22.27 U113.5 112.36,22.27 112.25,22.16 111.84,22.16 111.57,21.89 T1.22
PHY_TXRXN_B: length 8.2
  TOP w0.127: v1(115.06,17.73) 114.01,17.73 113.79,17.95 U112.5 112.49,17.95 112.38,17.84 111.84,17.84 111.82,17.83 110.71,17.83 110.46,18.08 T1.19
PHY_TXRXN_C: length 4.5
  TOP w0.127: v1(115.44,13.16) 114.96,13.64 U111.5 ; 106.96,14.27 T1.16 v1(109.19,14.27)
PHY_TXRXN_D: length 2.3
  TOP w0.127: U110.5 114.39,9.32 114.69,9.02 114.95,9.02 v1(115.41,8.56)
PHY_TXRXP_A: length 8.3
  TOP w0.127: v1(115.12,23.07) 114.01,23.07 113.71,22.77 U113.6 113.38,22.78 112.36,22.78 111.98,23.16 T1.23
PHY_TXRXP_B: length 8.5
  TOP w0.127: T1.20 108.55,19.35 109.31,18.59 112.23,18.59 112.36,18.46 113.38,18.46 U112.6 113.71,18.45 114.01,18.75 v1(115.12,18.75)
PHY_TXRXP_C: length 4.7
  TOP w0.127: 106.96,15.54 T1.17 v1(109.19,15.54) ; v1(115.54,14.91) 114.77,14.14 U111.6
PHY_TXRXP_D: length 2.3
  TOP w0.127: U110.6 114.51,9.82 114.65,9.95 114.9,9.95 v1(115.41,10.46)
UNNAMED_235_CAP_I87_A: length 1.8
  BOTTOM w0.127: v1(110.08,8.43) 110.84,7.67 C15.1
UNNAMED_235_H5007_I99_15: length 2.2
  TOP w0.127: v1(109.19,13) T1.15 106.96,13
UNNAMED_235_H5007_I99_18: length 2.2
  TOP w0.127: T1.18 v1(109.31,16.81)
UNNAMED_235_H5007_I99_21: length 6.1
  TOP w0.127: T1.21 108.23,20.62 108.42,20.81 111.88,20.81 112.49,20.2 R464.2 112.49,19.86
UNNAMED_235_H5007_I99_24: length 3.9
  TOP w0.127: T1.24 109.76,24.43 110.14,24.81 R465.2
USB_UART_VCC: length 0.7
  TOP w0.127: C10.1 v1(139.41,34.59)
